# Altium PCB Encoder.PcbDoc
Units mm, origin at the board's own origin, x right, y up, seen from the top; angles counter-clockwise.
Board outline 20.07 x 33.27 mm, 2 copper layers (Top Layer, Bottom Layer), stack 1.569 mm thick; 8 components, 4 nets, 23 pads, 0 vias.
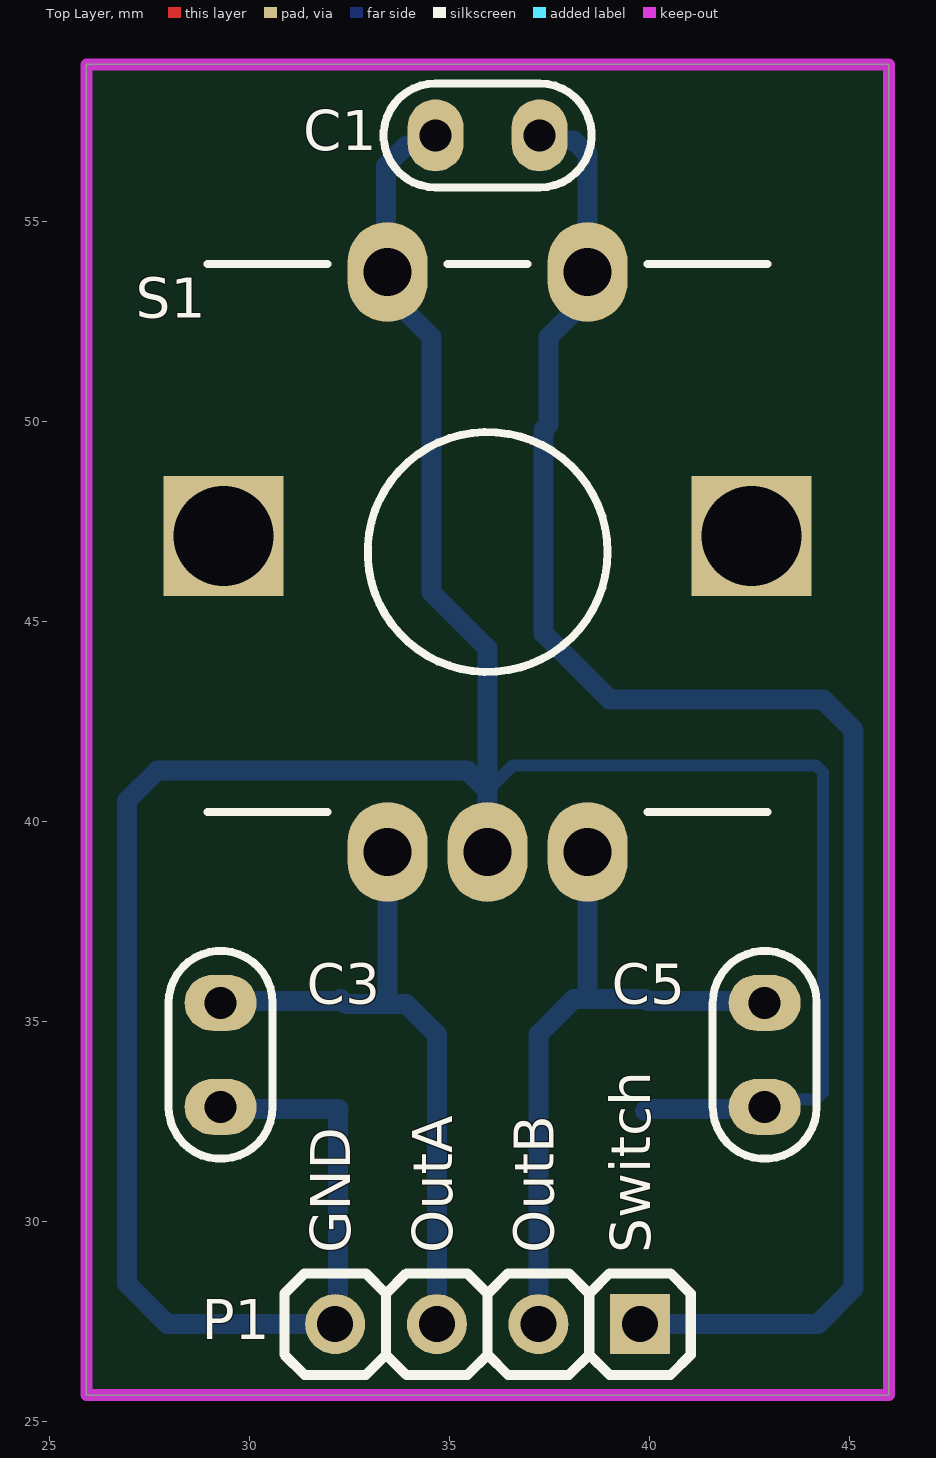
[diagram p0: Top Layer view]
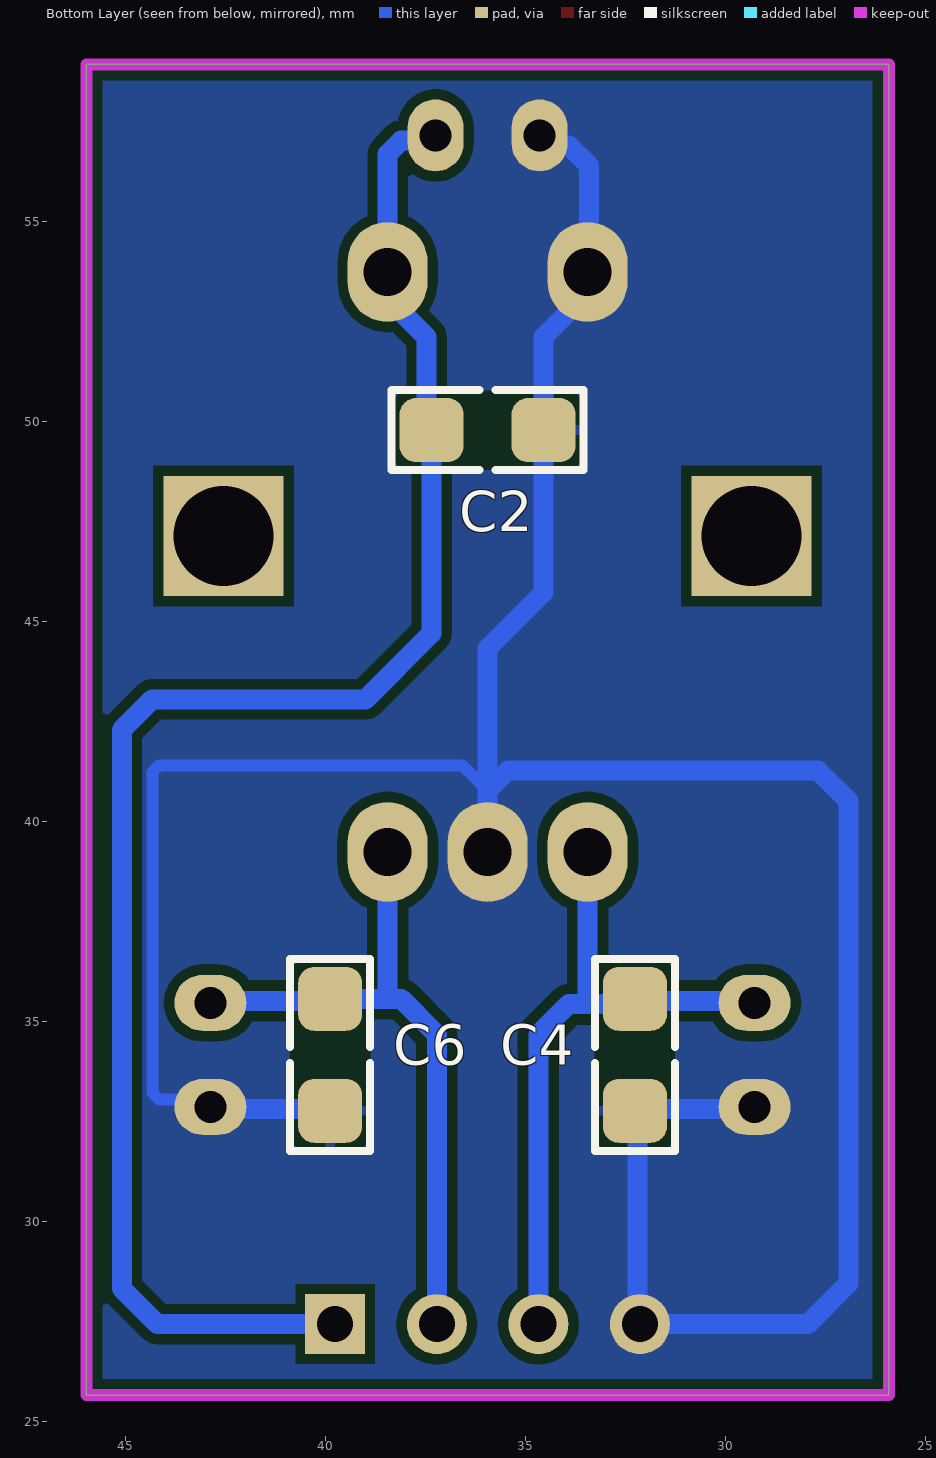
[diagram p1: Bottom Layer view, seen from below]

## Layer stack, top to bottom
Top Solder: solder mask 0.0254, SM-001, Dk 4
Top Layer: signal copper 0.035
Dielectric 1: core 1.4986, Core-043, Dk 4.3
Bottom Layer: signal copper 0.035
Bottom Solder: solder mask 0.0254, SM-001, Dk 4

## Board outline
25.908,25.654 25.908,58.928 45.974,58.928 45.974,25.654

## Design rules (kind name [scope] priority, off if disabled: settings)
Clearance Clearance_1 [InNamedPolygon('GND_L02_P000')] p1: gap=0.254 ignorepadtopadclearanceinfootprint=FALSE except(0: Arc-Hole Track-Hole SMDPad-Hole THPad-Hole Via-Hole Fill-Hole Poly-Hole Region-Hole Text-Hole)
Clearance [All] p2: gap=0.254 ignorepadtopadclearanceinfootprint=FALSE except(0: Arc-Hole Track-Hole SMDPad-Hole THPad-Hole Via-Hole Fill-Hole Poly-Hole Region-Hole Text-Hole)
PolygonConnect PolygonConnect_1 [All vs IsNamedPolygon('GND_L02_P000')] p1: thpad.connectstyle=Direct thpad.reliefconductorwidth=0.254 thpad.reliefentries=4 thpad.polygonreliefangle="90 Angle" thpad.airgapwidth=0.254 smdpad.connectstyle=Relief smdpad.reliefconductorwidth=0.254 smdpad.reliefentries=4 smdpad.polygonreliefangle="90 Angle" smdpad.airgapwidth=0.254 via.connectstyle=Relief via.reliefconductorwidth=0.254 via.reliefentries=4 via.polygonreliefangle="90 Angle" via.airgapwidth=0.254
PolygonConnect [All] p2: connectstyle=Relief reliefconductorwidth=0.254 reliefentries=4 polygonreliefangle="90 Angle" airgapwidth=0.254
RoutingVias [All] p1: holewidth=0.711 width=1.27 viastyle="Through Hole" minholewidth=0.711 minwidth=1.27 maxholewidth=0.711 maxwidth=1.27
SolderMaskExpansion [All] p1: expansion=0.102 istentingtop=FALSE
Width [All] p1: maxlimit=2 minlimit=0.254 preferedwidth=0.254 toplayer_maxwidth=0.254 minimp=50.000000 maximp=50.000000 favimp=50.000000
30 further rules are at their usual default settings.

## Components (designator, comment, footprint, x,y, rotation, side; value= is the part's Value field where it differs from the comment)
C1 "Capacitor Ceramic THD" C_CER_M5 35.941,57.15 r180 top value=100nf
C2 "Capacitor C SMD 1206" C1206 35.941,49.784 r180 bottom value=100nf
C3 "Capacitor Ceramic THD" C_CER_M5 29.266,34.163 r270 top value=100nf
C4 "Capacitor C SMD 1206" C1206 32.258,34.163 r270 bottom value=100nf
C5 "Capacitor Ceramic THD" C_CER_M5 42.87,34.163 r270 top value=100nf
C6 "Capacitor C SMD 1206" C1206 39.878,34.163 r270 bottom value=100nf
P1 "MHDR_1X04" MHDR1X04-254P 39.751,27.432 r180 top
S1 "Encoder" Encoder 35.941,46.736 r0 top

## Footprints (in the part's own frame and the unit in brackets; to place one, negate y for a bottom-side part, rotate by r counter-clockwise, add the part's x,y. Pads: shape width x height; smd on the part's side, far side on the other; paste and mask are expansions set on the pad)
C1206 [mm] "CHIP Capacitor, 3.2X1.6mm, 1206 www.smartw.ir"
  rrect50% 1.6x1.6 smd mask+0.075: 1(-1.4,0) 2(1.4,0)
  Top Layer pour cut-out: -0.8,1 -0.8,-1 0.8,-1 0.8,1
  silkscreen extent -2.4,-1 2.4,1, body extent -1.6,-0.8 1.6,0.8, height 1
C_CER_M5 [mm] "CAP, CER MULTILAYER, 5.0X2.5mm, pitch: 2.5mm, RAD0.1 www.smartw.ir"
  oval 1.4x1.8 hole 0.8: 1(-1.3,0) 2(1.3,0)
  silkscreen extent -2.6,-1.3 2.6,1.3, body extent -2.75,-1.25 2.75,1.25, height 5.5
Encoder [mm] "Alps Enkoder+ sw (www.Smartw.ir)"
  rect 3x3 hole 2.5: 0(-6.6,0.4)
  rect 3x3 hole 2.5 unplated: 0(6.6,0.4)
  oval 2x2.5 hole 1.2: 1(-2.5,-7.5) 2(2.5,-7.5) 3(0,-7.5) 4(-2.5,7) 5(2.5,7)
  silkscreen extent -7,-6.5 7,7.2, body extent -6.84,-7.83 6.81,7, height 21.5
MHDR1X04-254P [mm] "Male Header 1X04 with 2.54 mm Pitch"
  rect 1.5x1.5 hole 0.9: 1(0,0)
  round 1.5 hole 0.9: 2(2.54,0) 3(5.08,0) 4(7.62,0)
  silkscreen extent -1.27,-1.27 8.89,1.27, body extent -1.27,-1.27 8.89,1.27, height 8.43

## Part data
P1: "Male Header 1X04"
C1 C2 C3 C4 C5 C6 S1: ComponentLink1Description="Website Smart World", ComponentLink1URL=https://www.smartw.ir/, ComponentLink2Description=Telegram, ComponentLink2URL=https://t.me/altium_smartw, ComponentLink3Description=Instagram, ComponentLink3URL=https://Instagram.com/smartgw.ir, DatasheetVersion=2021

## Nets (pads, with @x,y where several pads share a name; then routed paths per layer and width w, separated by ;. In a path a pad name is that pad's centre, name@x,y a point inside that pad or via, vN(x,y) a via of type N, cw(c..) or ccw(c..) an arc to the next point about the centre after c; other vN are vias at no path point)
GND: C1.2 C2.2 C3.2 C4.2 C5.2 C6.2 P1.4 S1.3 S1.4 | length 76.7
  Bottom Layer w0.3: 35.941,40.767 36.576,41.402 44.147,41.402 44.323,41.226 44.323,33.219 44.147,33.044 43.05,33.044 C5.2
  Bottom Layer w0.5: C3.2 29.316,32.813 32.208,32.813 32.195,32.8 32.195,27.495 P1.4 27.94,27.432 26.924,28.448 26.924,40.513 27.686,41.275 35.433,41.275 35.941,40.767 ; C1.2 34.387,56.896 33.909,56.896 33.401,56.388 33.401,53.776 S1.4 33.441,53.211 34.541,52.111 C2.2 34.541,45.723 35.941,44.323 35.941,40.767 ; S1.3 35.941,40.767 ; C6.2 39.928,32.813 42.82,32.813 C5.2
OutA: C3.1 C4.1 P1.3 S1.1 | length 16.9
  Bottom Layer w0.5: C3.1 29.316,35.513 32.208,35.513 C4.1 32.388,35.433 33.401,35.433 ; S1.1 33.441,35.473 33.401,35.433 ; P1.3 34.671,34.671 33.909,35.433 33.401,35.433
OutB: C5.1 C6.1 P1.2 S1.2 | length 17
  Bottom Layer w0.5: P1.2 37.211,34.671 38.103,35.563 38.441,35.563 ; S1.2 38.441,35.563 ; C5.1 42.82,35.513 39.928,35.513 C6.1 38.441,35.563
Switch: C1.1 C2.1 P1.1 S1.5 | length 42.2
  Bottom Layer w0.5: C1.1 37.368,57.023 38.1,57.023 38.441,56.682 S1.5 38.441,53.08 37.465,52.104 37.465,49.908 C2.1 37.341,44.701 38.989,43.053 44.323,43.053 45.085,42.291 45.085,28.321 44.196,27.432 P1.1
pads on no net: S1.0

## Polygon pours and split planes (outlines as drawn)
GND on Bottom Layer "GND_L02_P000" (solid, pour order 0): 25.908,58.928 45.974,58.928 45.974,25.654 25.908,25.654

## Keep-outs
Keep-Out Layer:
  the board outline again, w0.3

## Silkscreen, mask and mechanical layers (free items; w line width, h text height)
Top Overlay:
  text "GND" at 32.512,29.21 h1 r90
  text "OutA" at 35.052,29.21 h1 r90
  text "OutB" at 37.592,29.21 h1 r90
  text "Switch" at 40.005,29.21 h1 r90